# EAGLE board motherboard_gerber (EAGLE 8.5.0)
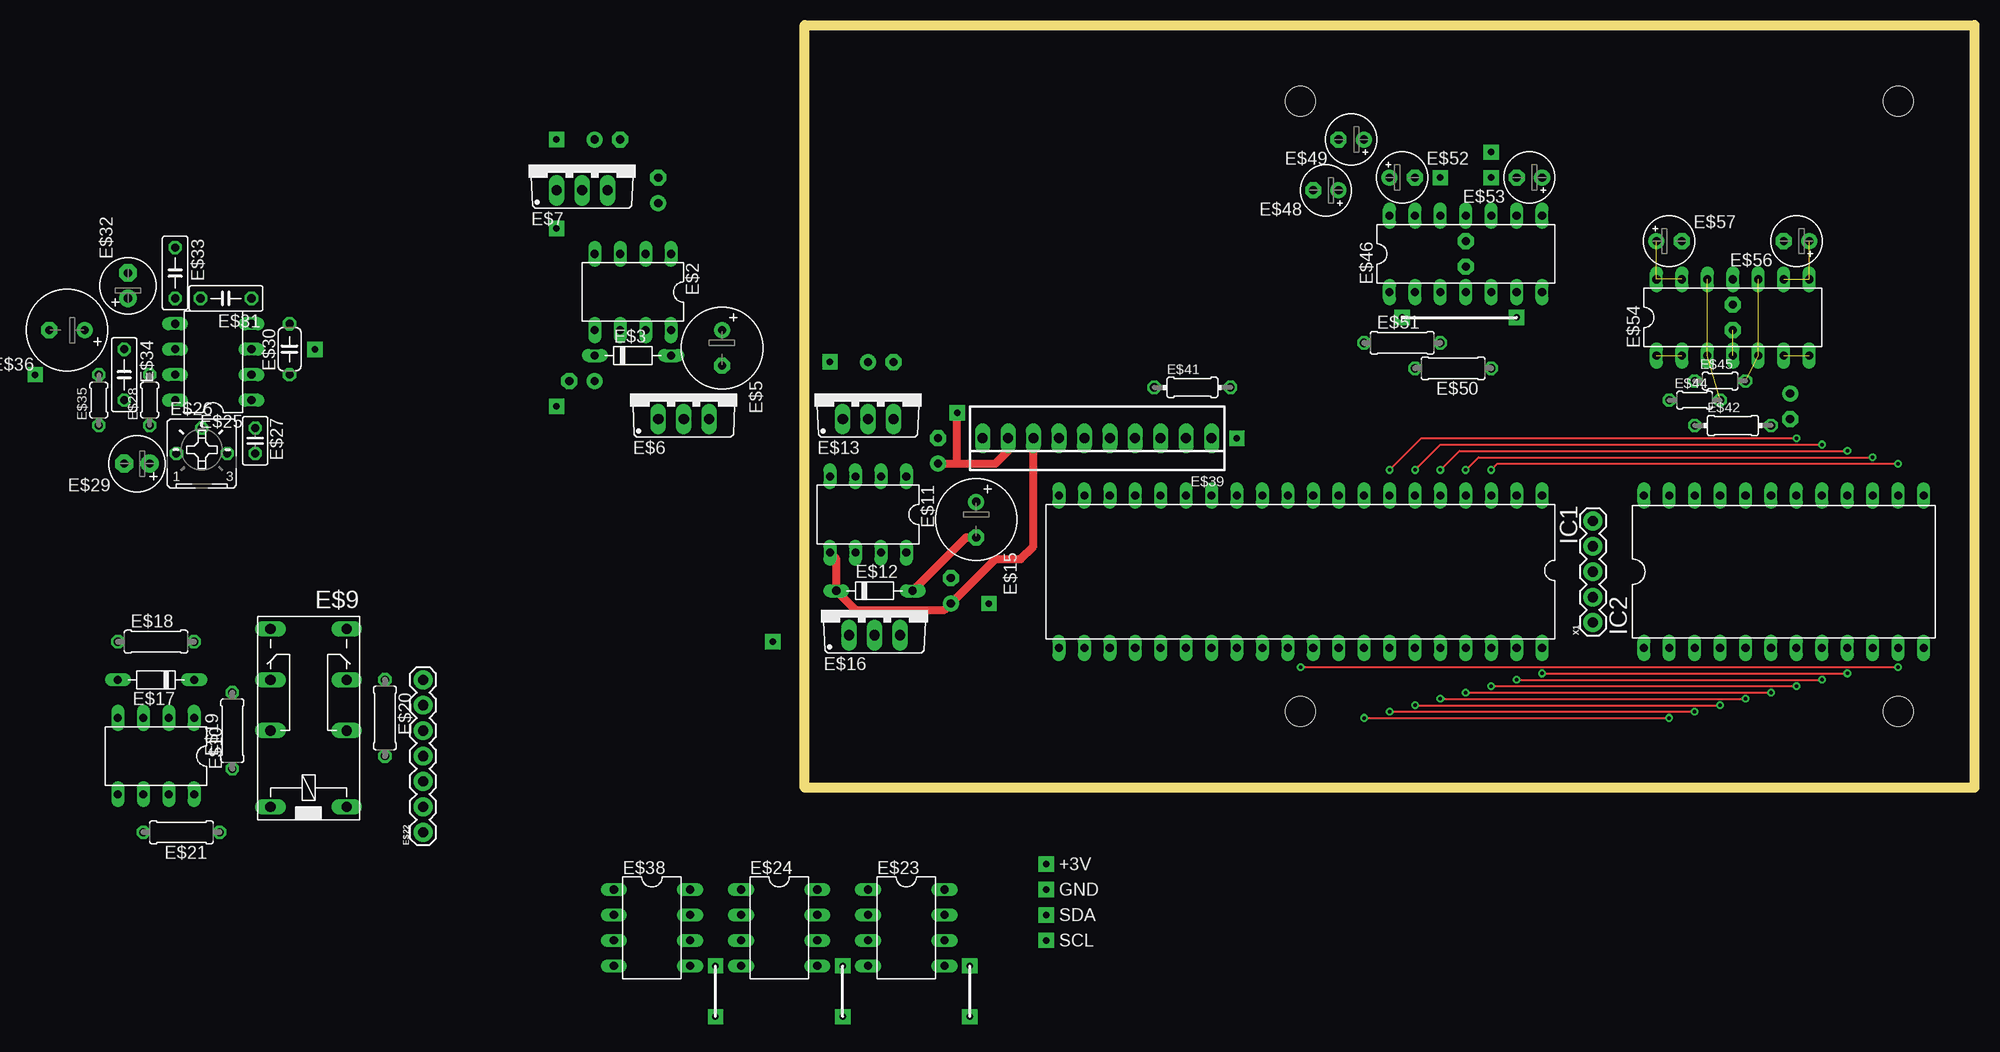
[diagram p0: board, top side]
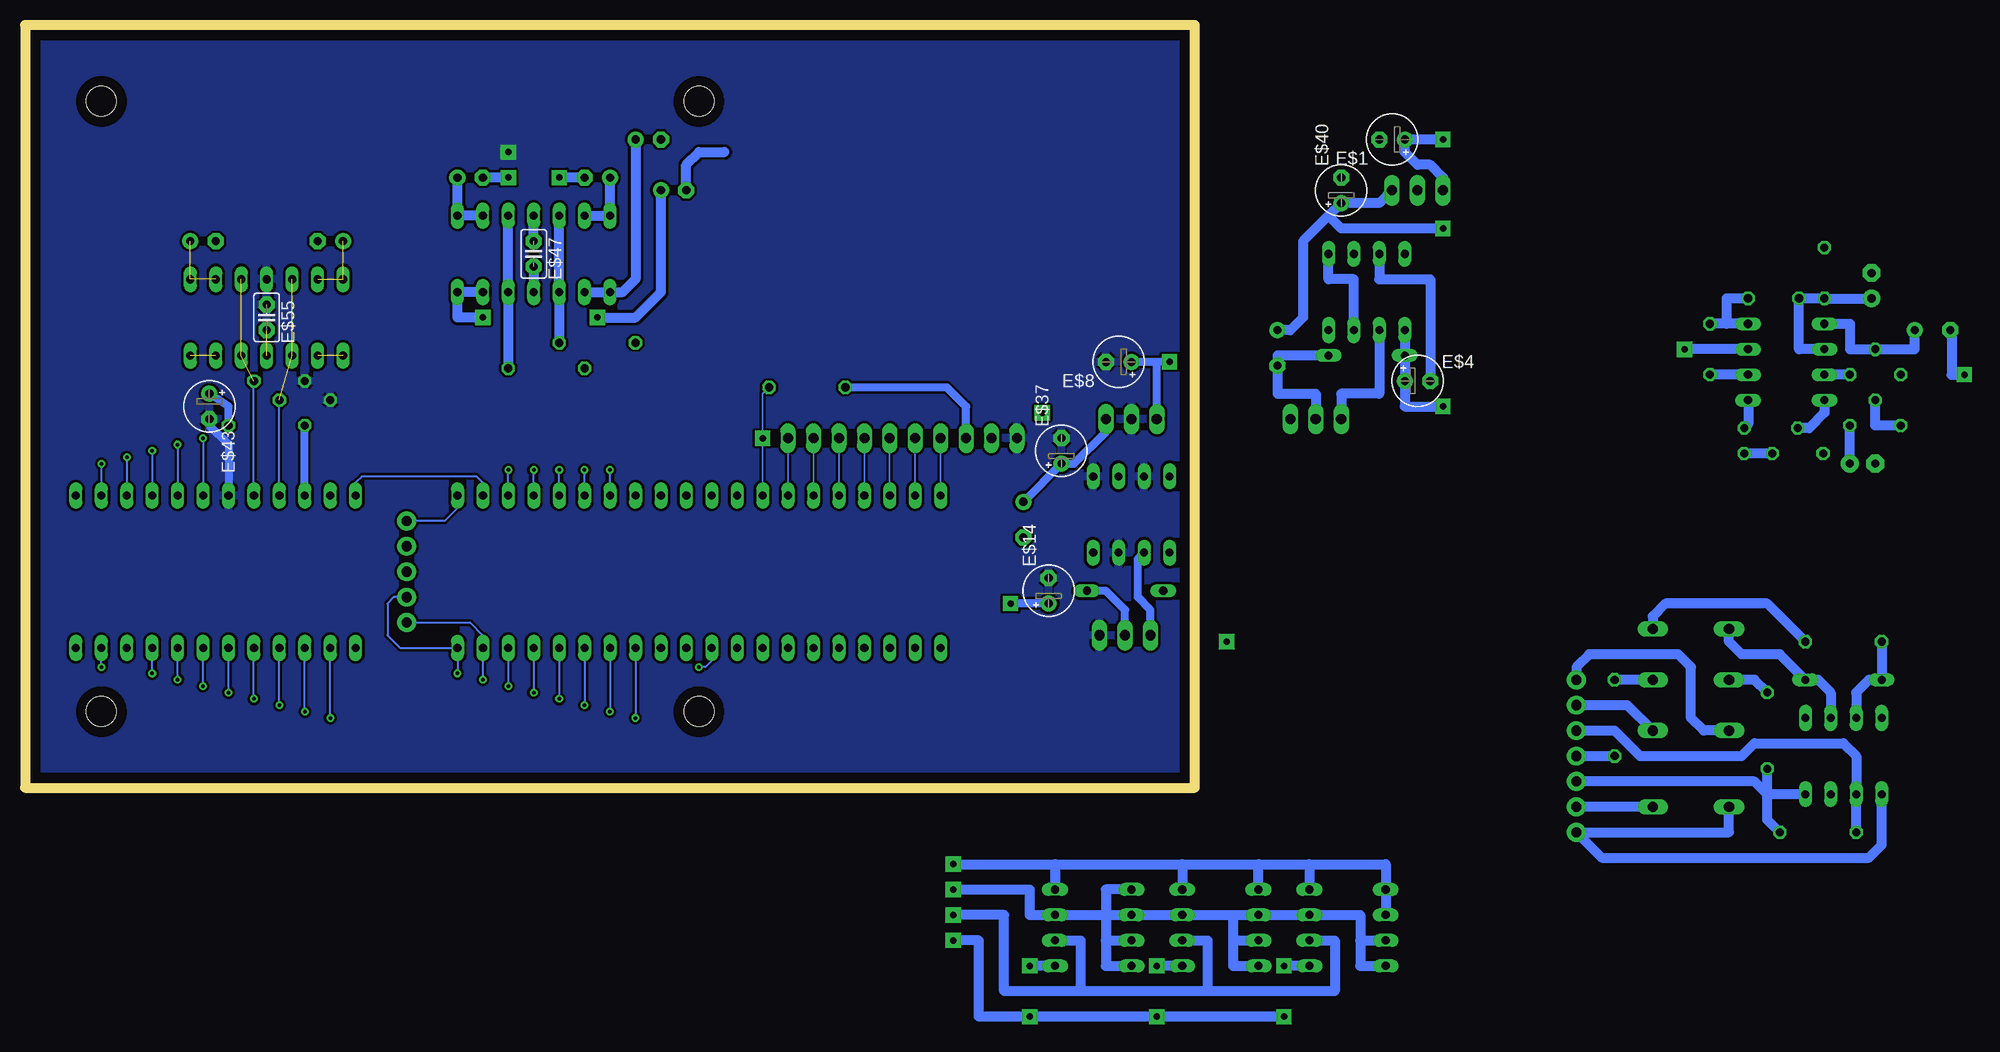
[diagram p1: board, bottom side, seen from below]

Size 116.84 x 76.2 mm. Coordinates in mm from the lower left corner, seen from the top.
Outline: 116.84,0 0,0 0,76.2 116.84,76.2 116.84,0
Copper layers (1*16): Top 0.035mm / dielectric 1.5mm / Bottom 0.035mm
Design rules "default": minimum track width 6mil, minimum drill 0.35mm, track to track 6mil, track to pad 6mil, pad to pad 6mil, via to via 6mil, smd to smd 6mil, copper to edge 40mil, drill to drill 6mil, minimum pad ring 10mil, minimum via ring 8mil, stop-mask expansion 4mil, vias tented up to drill 0mil, thermal gap 10mil
Holes 3 mm at 49.53,7.62 109.22,7.62 109.22,68.58 49.53,68.58

## Footprints (pad centres in the part's own frame; a part is rotated, then mirrored left to right if it is on the bottom)
E2,5-5 = drill 0.813 pad 1.6: + -1.27,0 | drill 0.813 pad 1.6 octagon: - 1.27,0
DIL08 = drill 0.813 long: 1 -3.81,-3.81; 2 -1.27,-3.81; 3 1.27,-3.81; 4 3.81,-3.81; 5 3.81,3.81; 6 1.27,3.81; 7 -1.27,3.81; 8 -3.81,3.81
D-7.5 = drill 0.813 long: A 3.81,0; C -3.81,0
E3,5-8 = drill 0.813 pad 1.6: + -1.778,0 | drill 0.813 pad 1.6 octagon: - 1.778,0
TO220V = drill 1.016 long: 1 -2.54,-2.54; 2 0,-2.54; 3 2.54,-2.54
351 = drill 1.016 long: 1 -3.81,-3.81; 16 -3.81,3.81; O1 8.89,-3.81; O2 8.89,3.81; P1 3.81,-3.81; P2 3.81,3.81; S1 13.97,-3.81; S2 13.97,3.81
0207/7 = drill 0.813 octagon: 1 -3.81,0; 2 3.81,0
1X07 = drill 1.016 pad 1.88: 1 0,0; 2 2.54,0; 3 5.08,0; 4 7.62,0; 5 10.16,0; 6 12.7,0; 7 15.24,0
B25P = drill 0.813 octagon: A -2.54,0; E 2.54,0; S 0,2.54
C025-025X050 = drill 0.813 octagon: 1 -1.27,0; 2 1.27,0
0204/5 = drill 0.813 octagon: 1 -2.54,0; 2 2.54,0
E2,5-6 = drill 0.813 pad 1.778: + -1.27,0 | drill 0.813 pad 1.778 octagon: - 1.27,0
C050-024X044 = drill 0.813 octagon: 1 -2.54,0; 2 2.54,0
C050-025X075 = drill 0.813 octagon: 1 -2.54,0; 2 2.54,0
22-23-2101 = drill 1 long: 1 -11.43,0; 2 -8.89,0; 3 -6.35,0; 4 -3.81,0; 5 -1.27,0; 6 1.27,0; 7 3.81,0; 8 6.35,0; 9 8.89,0; 10 11.43,0
0204/7 = drill 0.813 octagon: 1 -3.81,0; 2 3.81,0
DIL14 = drill 0.813 long: 1 -7.62,-3.81; 2 -5.08,-3.81; 3 -2.54,-3.81; 4 0,-3.81; 5 2.54,-3.81; 6 5.08,-3.81; 7 7.62,-3.81; 8 7.62,3.81; 9 5.08,3.81; 10 2.54,3.81; 11 0,3.81; 12 -2.54,3.81; 13 -5.08,3.81; 14 -7.62,3.81
C2.5-2 = drill 0.813 pad 1.6 octagon: 1 -1.27,0; 2 1.27,0
DIL40 = drill 0.813 long: 1 -24.13,-7.62; 2 -21.59,-7.62; 3 -19.05,-7.62; 4 -16.51,-7.62; 5 -13.97,-7.62; 6 -11.43,-7.62; 7 -8.89,-7.62; 8 -6.35,-7.62; 9 -3.81,-7.62; 10 -1.27,-7.62; 11 1.27,-7.62; 12 3.81,-7.62; 13 6.35,-7.62; 14 8.89,-7.62; 15 11.43,-7.62; 16 13.97,-7.62; 17 16.51,-7.62; 18 19.05,-7.62; 19 21.59,-7.62; 20 24.13,-7.62; 21 24.13,7.62; 22 21.59,7.62; 23 19.05,7.62; 24 16.51,7.62; 25 13.97,7.62; 26 11.43,7.62; 27 8.89,7.62; 28 6.35,7.62; 29 3.81,7.62; 30 1.27,7.62; 31 -1.27,7.62; 32 -3.81,7.62; 33 -6.35,7.62; 34 -8.89,7.62; 35 -11.43,7.62; 36 -13.97,7.62; 37 -16.51,7.62; 38 -19.05,7.62; 39 -21.59,7.62; 40 -24.13,7.62
DIL24-6 = drill 0.813 long: 1 -13.97,-7.62; 2 -11.43,-7.62; 3 -8.89,-7.62; 4 -6.35,-7.62; 5 -3.81,-7.62; 6 -1.27,-7.62; 7 1.27,-7.62; 8 3.81,-7.62; 9 6.35,-7.62; 10 8.89,-7.62; 11 11.43,-7.62; 12 13.97,-7.62; 13 13.97,7.62; 14 11.43,7.62; 15 8.89,7.62; 16 6.35,7.62; 17 3.81,7.62; 18 1.27,7.62; 19 -1.27,7.62; 20 -3.81,7.62; 21 -6.35,7.62; 22 -8.89,7.62; 23 -11.43,7.62; 24 -13.97,7.62
1X05 = drill 1.016 pad 1.88: 1 0,0; 2 2.54,0; 3 5.08,0; 4 7.62,0; 5 10.16,0

## Placement (x,y rotation side)
E$1  [E2,5-5]  -19.68,64.77 180 bottom  (outside the outline)
E$2  [DIL08]  -17.14,49.53 180 top  (outside the outline)
E$3  [D-7.5]  -17.14,43.18 0 top  (outside the outline)
E$4  [E2,5-5]  -22.22,40.64 0 bottom  (outside the outline)
E$5  [E3,5-8]  -8.26,43.94 270 top  (outside the outline)
E$6  [TO220V]  -12.07,39.37 0 top  (outside the outline)
E$7  [TO220V]  -22.22,62.23 0 top  (outside the outline)
E$8  [E2,5-5]  7.62,42.54 180 bottom
E$9  [351]  -49.53,1.9 90 top  (outside the outline)
E$10  [DIL08]  -64.77,3.18 180 top  (outside the outline)
E$11  [DIL08]  6.35,27.3 180 top
E$12  [D-7.5]  6.98,19.69 0 top
E$13  [TO220V]  6.35,39.37 0 top
E$14  [E2,5-5]  14.6,19.69 90 bottom
E$15  [E3,5-8]  17.14,26.8 270 top
E$16  [TO220V]  6.98,17.78 0 top
E$17  [D-7.5]  -64.77,10.79 180 top  (outside the outline)
E$18  [0207/7]  -64.77,14.6 0 top  (outside the outline)
E$19  [0207/7]  -57.15,5.71 90 top  (outside the outline)
E$20  [0207/7]  -41.91,6.98 270 top  (outside the outline)
E$21  [0207/7]  -62.23,-4.45 180 top  (outside the outline)
E$22  [1X07]  -38.1,-4.45 90 top  (outside the outline)
E$23  [DIL08]  10.16,-13.97 270 top  (outside the outline)
E$24  [DIL08]  -2.54,-13.97 270 top  (outside the outline)
E$25  [DIL08]  -59.05,42.54 90 top  (outside the outline)
E$26  [B25P]  -60.2,33.4 0 top  (outside the outline)
E$27  [C025-025X050]  -54.86,34.67 270 top  (outside the outline)
E$28  [0204/5]  -65.41,38.73 90 top  (outside the outline)
E$29  [E2,5-6]  -66.67,32.38 180 top  (outside the outline)
E$30  [C050-024X044]  -51.44,43.81 90 top  (outside the outline)
E$31  [C050-025X075]  -57.79,48.89 180 top  (outside the outline)
E$32  [E2,5-6]  -67.56,50.16 90 top  (outside the outline)
E$33  [C050-025X075]  -62.87,51.43 270 top  (outside the outline)
E$34  [C050-025X075]  -67.95,41.27 270 top  (outside the outline)
E$35  [0204/5]  -70.48,38.73 90 top  (outside the outline)
E$36  [E3,5-8]  -73.66,45.72 180 top  (outside the outline)
E$37  [E2,5-5]  13.33,33.66 90 bottom
E$38  [DIL08]  -15.24,-13.97 270 top  (outside the outline)
E$39  [22-23-2101]  29.21,34.92 180 top
E$40  [E2,5-5]  -14.61,59.69 90 bottom  (outside the outline)
E$41  [0204/7]  38.73,40 0 top
E$42  [0204/7]  92.71,36.2 0 top
E$43  [E2,5-5]  98.42,38.1 270 bottom
E$44  [0204/5]  88.9,38.73 0 top
E$45  [0204/5]  91.44,40.64 0 top
E$46  [DIL14]  66.04,53.34 0 top
E$47  [C2.5-2]  66.04,53.34 270 bottom
E$48  [E2,5-5]  52.07,59.69 180 top
E$49  [E2,5-5]  54.61,64.77 180 top
E$50  [0207/7]  64.77,41.91 180 top
E$51  [0207/7]  59.69,44.45 0 top
E$52  [E2,5-5]  59.69,60.96 0 top
E$53  [E2,5-5]  72.39,60.96 180 top
E$54  [DIL14]  92.71,46.99 0 top
E$55  [C2.5-2]  92.71,46.99 270 bottom
E$56  [E2,5-5]  99.06,54.61 180 top
E$57  [E2,5-5]  86.36,54.61 0 top
IC1  [DIL40]  49.53,21.59 180 top
IC2  [DIL24-6]  97.79,21.59 0 top
X1  [1X05]  78.74,16.51 90 top

## Library data of the parts
E$1 E$4 E$5 E$8 E$14 E$15 E$29 E$32 E$36 E$37 E$40 E$43 E$48 E$49 E$52 E$53 E$56 E$57 = BeagleBone_Blue_R3
E$2 E$11 E$23-E$25 E$38 E$46 E$54 = 40xx
E$3 E$12 E$17 = diode
E$6 E$7 E$13 E$16 = transistor-pnp
E$9 = relay
E$10 = 74xx-eu
E$18-E$21 E$27 E$28 E$30 E$31 E$33-E$35 E$41 E$42 E$44 E$45 E$50 E$51 = BeagleBone_Black_Wireless
E$22 X1 = SparkFun-Connectors
E$26 = pot
E$39 = con-molex
E$47 E$55 = capacitor-wima
IC1 IC2 = ic-package

## Nets
+3V: E$13.3 E$15.+ E$37.+ E$39.9
+5V: E$11.5 E$12.C E$14.+ E$39.8 E$41.1
GND: E$8.- E$11.1 E$11.3 E$11.7 E$13.2 E$14.- E$16.3 E$37.- E$39.10 E$43.- E$44.1 E$45.1 E$54.11 E$55.1 IC2.19
S$2: IC1.3 IC2.14
S$3: IC1.4 IC2.15
S$4: IC1.5 IC2.16
S$5: IC1.6 IC2.17
S$6: IC1.7 IC2.18
S$8: IC1.2 IC2.24
S$11: IC1.38 IC2.7
S$12: IC1.37 IC2.6
S$13: IC1.36 IC2.5
S$14: IC1.35 IC2.4
S$15: IC1.34 IC2.3
S$16: IC1.33 IC2.2
S$17: IC1.30 IC2.11
S$18: IC1.1 X1.5
S$19: IC1.40 IC2.9 X1.2
S$20: IC1.39 IC2.8 X1.1
S$21: E$5.+ E$7.3 E$40.+
S$22: E$9.16 E$10.5 E$22.1
S$23: E$20.2 E$22.4
S$24: E$9.P2 E$22.7
S$25: E$23.8 E$24.1 E$24.8 E$38.2 E$38.8
S$26: E$9.1 E$22.2
S$27: E$9.P1 E$22.6
S$28: E$9.S2 E$10.2 E$17.C
S$29: E$10.3 E$17.A E$18.1
S$30: E$10.6 E$21.2 E$22.5
S$31: E$10.8 E$19.1 E$21.1 E$22.3
S$32: E$9.O2 E$19.2
S$33: E$9.S1 E$18.2
S$34: E$9.O1 E$20.1
S$35: E$38.6
S$36: E$24.6
S$37: E$23.6
S$38: E$38.5
S$39: E$24.5
S$40: E$23.5
S$44: E$24.3 E$24.4 E$38.3 E$38.4 E$38.7
S$45: E$23.1 E$23.3 E$23.4
S$46: E$39.7 IC1.20
S$47: E$41.2 IC1.13
S$48: E$12.A E$15.- E$16.2
S$49: E$39.6 IC1.19
S$50: E$11.6 E$16.1
S$51: E$39.5 IC1.18
S$52: E$39.4 IC1.17
S$53: E$39.3 IC1.16
S$54: E$39.2 IC1.15
S$55: E$39.1 IC1.14
S$56: E$42.1 IC2.22
S$57: E$42.2 E$43.+
S$58: E$44.2 E$54.3 E$54.12 IC2.21
S$59: E$45.2 E$54.5 E$54.10 IC2.20
S$60: E$54.6 E$54.7
S$61: E$54.1 E$54.2
S$62: E$54.13 E$54.14 E$57.+
S$63: E$54.8 E$54.9 E$56.+
S$64: E$54.4 E$55.2
S$65: E$2.5 E$3.C
S$66: E$3.A E$5.- E$6.2
S$67: E$2.3 E$4.-
S$68: E$2.1 E$2.7
S$70: E$2.6 E$6.1
S$73: E$46.13 E$46.14 E$52.+
S$74: E$46.1 E$46.2 E$49.+
S$75: E$46.8 E$46.9 E$53.+
S$76: E$52.-
S$79: E$25.8 E$26.S
S$82: E$48.-
S$83: E$26.E E$27.2
S$84: E$46.3 E$46.12 E$51.2
S$85: E$46.5 E$46.10 E$50.1
S$86: E$46.11 E$47.1
S$87: E$46.4 E$47.2
S$88: E$48.+
S$89: E$46.6 E$46.7
S$90: E$53.-
S$93: E$25.7 E$28.2
S$94: E$28.1 E$29.+
S$96: E$25.4 E$30.2 E$31.1
S$97: E$25.2 E$30.1
S$98: E$25.3
S$99: E$25.5 E$34.1 E$36.+
S$100: E$25.1 E$27.1
S$101: E$25.6 E$31.2 E$32.+ E$33.2
S$102: E$34.2 E$35.1
S$104: E$1.+ E$7.1
VIN: E$8.+ E$13.1

## Tracks (layer width: path | path; a pad name or v marks a point on that pad's centre or on a via)
+3V  (via drill 0.65 pad 1.52)
  Top 0.813: E$37.+ 15.24,32.38 | 15.24,32.38 v15.24,37.46 | 15.24,32.38 19.05,32.38 20.32,33.66 E$39.9
  Bottom 0.813: E$15.+ E$37.+ 12.06,32.38 8.89,35.56 E$13.3
+5V  (via drill 0.65 pad 1.52)
  Top 0.813: E$39.8 22.86,24.13 21.59,22.86 19.05,22.86 E$14.+ 13.97,17.78 5.08,17.78 E$12.C 3.18,22.86 E$11.5
  Bottom 0.813: E$39.8 22.86,38.1 24.77,40 E$41.1 | E$14.+ v18.42,18.42
GND  (via drill 0.65 pad 1.52)
  Bottom 0.813: E$43.- 98.42,36.2 96.52,34.29 IC2.19
  other vias: 68.58,63.5
  pour Bottom (isolate 0.254): -3.81,78.74 -3.81,-0.64 0,-4.45 117.47,-4.45 122.55,0.64 122.55,77.47 117.47,82.55 0,82.55
S$2  (via drill 0.35)
  Top 0.203: v68.58,31.75 69.22,32.38 v109.22,32.38
  Bottom 0.203: IC1.3 v68.58,31.75 | v109.22,32.38 IC2.14
S$3  (via drill 0.35)
  Top 0.203: v66.04,31.75 67.31,33.02 v106.68,33.02
  Bottom 0.203: IC1.4 v66.04,31.75 | v106.68,33.02 IC2.15
S$4  (via drill 0.35)
  Top 0.203: v63.5,31.75 65.41,33.66 v104.14,33.66
  Bottom 0.203: IC1.5 v63.5,31.75 | v104.14,33.66 IC2.16
S$5  (via drill 0.35)
  Top 0.203: v60.96,31.75 63.5,34.29 v101.6,34.29
  Bottom 0.203: IC1.6 v60.96,31.75 | v101.6,34.29 IC2.17
S$6  (via drill 0.35)
  Top 0.203: v58.42,31.75 61.59,34.92 v99.06,34.92
  Bottom 0.203: IC1.7 v58.42,31.75 | v99.06,34.92 IC2.18
S$8
  Bottom 0.203: IC1.2 71.12,30.48 71.75,31.11 83.19,31.11 83.82,30.48 IC2.24
S$9  (via drill 0.65 pad 1.52)
  other vias: -3.17,14.6
S$10  (via drill 0.65 pad 1.52)
  other vias: 43.18,34.92
S$11  (via drill 0.35)
  Top 0.203: v68.58,10.16 v99.06,10.16
  Bottom 0.203: IC1.38 v68.58,10.16 | v99.06,10.16 IC2.7
S$12  (via drill 0.35)
  Top 0.203: v66.04,9.53 v96.52,9.53
  Bottom 0.203: IC1.37 v66.04,9.53 | v96.52,9.53 IC2.6
S$13  (via drill 0.35)
  Top 0.203: v63.5,8.89 v93.98,8.89
  Bottom 0.203: IC1.36 v63.5,8.89 | v93.98,8.89 IC2.5
S$14  (via drill 0.35)
  Top 0.203: v60.96,8.25 v91.44,8.25
  Bottom 0.203: IC1.35 v60.96,8.25 | v91.44,8.25 IC2.4
S$15  (via drill 0.35)
  Top 0.203: v58.42,7.62 v88.9,7.62
  Bottom 0.203: IC1.34 v58.42,7.62 | v88.9,7.62 IC2.3
S$16  (via drill 0.35)
  Top 0.203: v55.88,6.98 v86.36,6.98
  Bottom 0.203: IC1.33 v55.88,6.98 | v86.36,6.98 IC2.2
S$17  (via drill 0.35)
  Top 0.203: v49.53,12.06 v109.22,12.06
  Bottom 0.203: IC1.30 48.26,12.7 48.89,12.06 v49.53,12.06 | v109.22,12.06 IC2.11
S$18
  Bottom 0.203: IC1.1 73.66,27.94 74.93,26.67 X1.5
S$19  (via drill 0.35)
  Top 0.203: v73.66,11.43 v104.14,11.43
  Bottom 0.203: X1.2 80.01,19.05 80.64,18.42 80.64,15.24 79.38,13.97 IC1.40 v73.66,11.43 | v104.14,11.43 IC2.9
S$20  (via drill 0.35)
  Top 0.203: v71.12,10.79 v101.6,10.79
  Bottom 0.203: X1.1 72.39,16.51 71.12,15.24 IC1.39 v71.12,10.79 | v101.6,10.79 IC2.8
S$21  (via drill 0.65 pad 1.52)
  Bottom 1.016: E$7.3 -18.41,58.42 E$40.+ -13.34,57.15 | E$5.+ -9.53,45.72 -10.79,46.99 -10.79,54.61 -13.34,57.15 | v-24.76,55.88 -14.61,55.88 -13.34,57.15
S$22
  Bottom 1.016: E$9.16 -53.34,-4.45 E$22.1 -40.64,-6.98 -67.31,-6.98 -68.58,-5.71 E$10.5
S$23
  Bottom 1.016: E$22.4 E$20.2
S$24
  Bottom 1.016: E$9.P2 -50.8,5.71 -49.53,6.98 -49.53,12.06 -48.26,13.33 -39.37,13.33 -38.1,12.06 E$22.7
S$25  (via drill 0.65 pad 1.52)
  Bottom 1.016: v24.13,-7.62 13.97,-7.62 | 13.97,-7.62 E$23.8 | 13.97,-7.62 1.27,-7.62 | 1.27,-7.62 E$24.8 | 1.27,-7.62 -6.35,-7.62 | -6.35,-7.62 -11.43,-7.62 | -11.43,-7.62 E$38.8 | E$24.1 -6.35,-7.62 | -11.43,-7.62 -19.05,-7.62 E$38.2
S$26
  Bottom 1.016: E$9.1 E$22.2
S$27
  Bottom 1.016: E$9.P1 -43.18,8.25 E$22.6
S$28
  Bottom 1.016: E$10.2 -63.5,9.53 -62.23,10.79 E$17.C -58.42,13.33 -54.61,13.33 -53.34,14.6 E$9.S2
S$29
  Bottom 1.016: E$18.1 E$17.A -67.31,10.79 -66.04,9.53 E$10.3
S$30
  Bottom 1.016: E$21.2 E$10.6 -66.04,3.18 -64.77,4.45 -55.88,4.45 -54.61,3.18 -44.45,3.18 -41.91,5.71 E$22.5
S$31
  Bottom 1.016: E$21.1 -57.15,-3.17 -57.15,-0.64 | -57.15,-0.64 E$19.1 | E$10.8 -57.15,-0.64 | -57.15,-0.64 -55.88,0.64 E$22.3
S$32
  Bottom 1.016: E$19.2 -55.88,10.79 E$9.O2
S$33
  Bottom 1.016: E$18.2 -57.15,18.42 -46.99,18.42 -45.72,17.14 E$9.S1
S$34
  Bottom 1.016: E$9.O1 E$20.1
S$35  (via drill 0.65 pad 1.52)
  Bottom 1.016: E$38.6 -13.97,-15.24 -13.97,-20.32 19.05,-20.32 19.05,-12.7 v24.13,-12.7
S$36
  Bottom 1.016: E$24.6 -1.27,-15.24 -1.27,-20.32
S$37
  Bottom 1.016: E$23.6 11.43,-15.24 11.43,-20.32
S$38  (via drill 0.65 pad 1.52)
  Bottom 1.016: E$38.5 v-8.89,-17.78
S$39  (via drill 0.65 pad 1.52)
  Bottom 1.016: E$24.5 v3.81,-17.78
S$40  (via drill 0.65 pad 1.52)
  Bottom 1.016: E$23.5 v16.51,-17.78
S$41  (via drill 0.65 pad 1.52)
  Bottom 1.016: v-8.89,-22.86 21.59,-22.86 21.59,-15.24 v24.13,-15.24
S$42  (via drill 0.65 pad 1.52)
  other vias: 3.81,-22.86
S$43  (via drill 0.65 pad 1.52)
  other vias: 16.51,-22.86
S$44  (via drill 0.65 pad 1.52)
  Bottom 1.016: v24.13,-10.16 16.51,-10.16 16.51,-12.7 -3.81,-12.7 | -3.81,-12.7 E$38.7 -16.51,-12.7 -16.51,-15.24 | -3.81,-12.7 -3.81,-15.24 | -3.81,-15.24 E$24.3 | -3.81,-15.24 -3.81,-17.78 E$24.4 | -16.51,-15.24 E$38.3 | -16.51,-15.24 -16.51,-17.78 E$38.4
S$45
  Bottom 1.016: E$23.1 8.89,-10.16 8.89,-15.24 | 8.89,-15.24 E$23.3 | 8.89,-15.24 8.89,-17.78 E$23.4
S$46
  Bottom 0.152: E$39.7 IC1.20
S$47
  Bottom 0.152: E$41.2 43.18,39.37 IC1.13
S$48
  Top 0.813: E$12.A 16.13,25.02 E$15.-
  Bottom 0.813: E$16.2 6.98,17.78 8.89,19.69 E$12.A
S$49
  Bottom 0.152: E$39.6 IC1.19
S$50
  Bottom 0.813: E$16.1 4.45,17.78 5.71,19.05 5.71,22.86 E$11.6
S$51
  Bottom 0.152: E$39.5 IC1.18
S$52
  Bottom 0.152: E$39.4 IC1.17
S$53
  Bottom 0.152: E$39.3 IC1.16
S$54
  Bottom 0.152: E$39.2 IC1.15
S$55
  Bottom 0.152: E$39.1 IC1.14
S$56
  Bottom 0.813: IC2.22 E$42.1
S$57
  Bottom 0.813: E$42.2 96.52,38.1 E$43.+
S$58  (2 unrouted)
  Bottom 0.203: IC2.21 E$44.2
S$59  (2 unrouted)
  Bottom 0.203: IC2.20 E$45.2
S$60  (1 unrouted)
S$61  (1 unrouted)
S$62  (2 unrouted)
S$63  (2 unrouted)
S$64  (1 unrouted)
S$65  (via drill 0.65 pad 1.52)
  Bottom 1.016: E$2.5 E$3.C -20.95,38.1 v-24.76,38.1
S$66
  Bottom 1.016: E$3.A -8.26,43.18 E$5.- -8.26,39.37 -12.07,39.37 E$6.2
S$67
  Bottom 1.016: E$2.3 -18.41,50.8 -23.49,50.8 E$4.-
S$68
  Bottom 1.016: E$2.7 -15.88,50.8 -13.34,50.8 E$2.1
S$70
  Bottom 1.016: E$2.6 -18.41,39.37 -14.61,39.37 E$6.1
S$73
  Bottom 1.016: E$46.13 E$46.14 E$52.+
S$74
  Bottom 1.016: E$46.2 E$46.1 57.15,49.53 55.88,50.8 E$49.+
S$75
  Bottom 1.016: E$46.9 E$46.8 E$53.+
S$76  (via drill 0.65 pad 1.52)
  Bottom 1.016: E$52.- v63.5,60.96
S$79
  Bottom 1.016: E$25.8 -62.87,37.46 -61.34,35.94 E$26.S
S$82
  Bottom 1.016: E$48.- 50.8,62.23 49.53,63.5 46.99,63.5
S$83
  Bottom 1.016: E$26.E E$27.2
S$84
  Bottom 1.016: E$46.12 E$46.3 E$51.2
S$85
  Bottom 1.016: E$46.10 E$46.5 E$50.1
S$86
  Bottom 1.016: E$47.1 E$46.11
S$87
  Bottom 1.016: E$47.2 E$46.4
S$88  (via drill 0.65 pad 1.52)
  Bottom 1.016: v59.69,46.99 55.88,46.99 53.34,49.53 E$48.+
S$89  (via drill 0.65 pad 1.52)
  Bottom 1.016: E$46.6 E$46.7 73.66,46.99 v71.12,46.99
S$90  (via drill 0.65 pad 1.52)
  Bottom 1.016: v68.58,60.96 E$53.-
S$93
  Bottom 1.016: E$28.2 E$25.7
S$94
  Bottom 1.016: E$29.+ E$28.1
S$96
  Bottom 1.016: E$25.4 -53.09,46.35 | -53.09,46.35 E$30.2 | E$31.1 -53.09,48.89 -53.09,46.35
S$97
  Bottom 1.016: E$25.2 E$30.1
S$98  (via drill 0.65 pad 1.52)
  Bottom 1.016: E$25.3 v-48.9,43.81
S$99
  Bottom 1.016: E$25.5 -65.41,46.35 -65.41,43.81 E$34.1 -71.88,43.81 E$36.+
S$100
  Bottom 1.016: E$25.1 -55.25,36.32 E$27.1
S$101
  Bottom 1.016: E$32.+ E$33.2 E$31.2 -60.33,43.81 E$25.6
S$102
  Bottom 1.016: E$35.1 -67.95,36.2 E$34.2
S$103  (via drill 0.65 pad 1.52)
  Bottom 1.016: -75.56,45.09 -75.56,41.27 v-76.84,41.27
S$104  (via drill 0.65 pad 1.52)
  Bottom 1.016: E$7.1 -24.76,60.96 -23.49,62.23 -22.22,62.23 -20.95,63.5 E$1.+ v-24.76,64.77
VIN  (via drill 0.65 pad 1.52)
  Bottom 0.813: E$13.1 3.81,42.54 | v2.54,42.54 3.81,42.54 | 3.81,42.54 E$8.+

## Text on the board
tPlace: +3V | GND | SDA | SCL